# Altium PCB VOLTAGE_MEASURE.PcbDoc
Units mil, origin at the board's own origin, x right, y up, seen from the top; angles counter-clockwise.
Board outline 885.03 x 1027.53 mil, 2 copper layers (Top Layer, Bottom Layer); 24 components, 15 nets, 70 pads, 0 vias.
Unrouted connection lines stored in the file: 1.
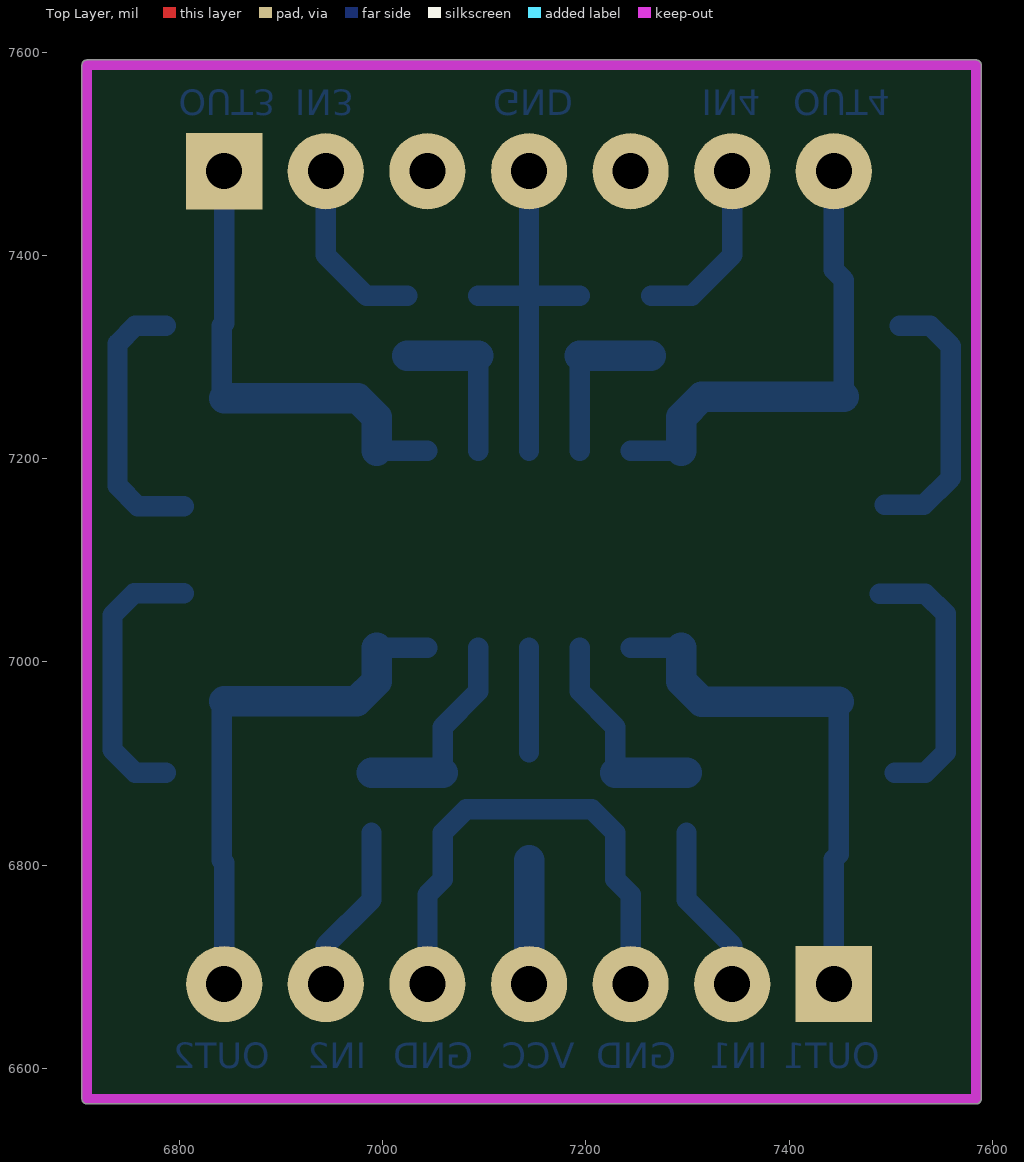
[diagram p0: Top Layer view]
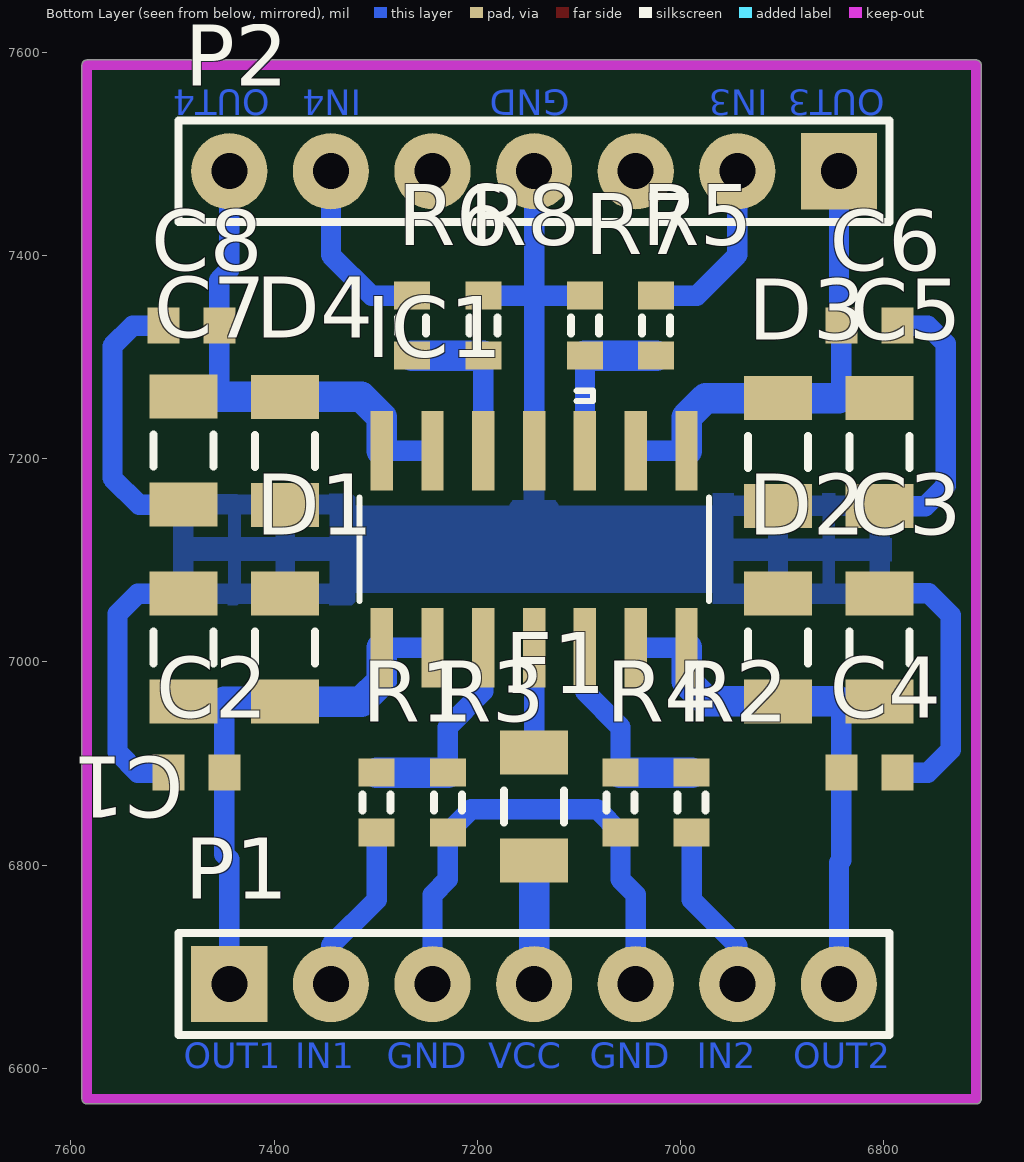
[diagram p1: Bottom Layer view, seen from below]

## Layer stack, top to bottom
Top Solder: solder mask 0.4, Solder Resist, Dk 3.5
Top Layer: signal copper 1.4
Dielectric 1: dielectric 12.6, FR-4, Dk 4.8
Bottom Layer: signal copper 1.4
Bottom Solder: solder mask 0.4, Solder Resist, Dk 3.5

## Board outline
6703.98,6570 ccw(c6709,6570) 6709,6564.98 7584,6564.98 ccw(c7584,6570) 7589.02,6570 7589.02,7587.5 ccw(c7584,7587.5) 7584,7592.52 6709,7592.52 ccw(c6709,7587.5) 6703.98,7587.5

## Design rules (kind name [scope] priority, off if disabled: settings)
Clearance [All] p1: gap=15 ignorepadtopadclearanceinfootprint=FALSE except(0: Arc-Text Arc-Hole Track-Text Track-Hole SMDPad-Text SMDPad-Hole THPad-Text THPad-Hole Via-Text Via-Hole Fill-Text Fill-Hole Poly-Text Poly-Hole Region-Text Region-Hole Text-Text Text-Hole; 10: Arc-Arc Arc-Track Arc-SMDPad Arc-THPad Arc-Via Track-Track Track-SMDPad Track-THPad Track-Via SMDPad-SMDPad SMDPad-THPad SMDPad-Via THPad-THPad THPad-Via Via-Via; 20: Arc-Fill Arc-Poly Arc-Region Track-Fill Track-Poly Track-Region)
PolygonConnect [All] p1: connectstyle=Relief reliefconductorwidth=20 reliefentries=4 polygonreliefangle="90 Angle" airgapwidth=10
RoomDefinition VOLTAGE_MEASURE [InComponentClass('VOLTAGE_MEASURE')] p1: confinementstyle=ConfineIn formatcopy=TRUE lockcomponents=FALSE outline 6709,6570 7584,6570 7584,7587.5 6709,7587.5
RoutingLayers [All] p1: top layer_v5=FALSE bottom layer_v5=TRUE
RoutingVias [All] p1: holewidth=28 width=50 viastyle="Through Hole" minholewidth=28 minwidth=50 maxholewidth=28 maxwidth=50
SolderMaskExpansion [All] p1: expansion=4
Width [All] p1: maxlimit=50 minlimit=10 preferedwidth=20 minimp=50.000000 maximp=50.000000 favimp=50.000000
29 further rules are at their usual default settings.

## Components (designator, comment, footprint, x,y, rotation, side; value= is the part's Value field where it differs from the comment)
C1 "Cap" C1206 7489,7014.15 r270 bottom value=10uF
C2 "Cap" 1608[0603] 7476.44,6891 r180 bottom value=0.1uF
C3 "Cap" C1206 6804,7014.35 r270 bottom value=10uF
C4 "Cap" 1608[0603] 6814,6891 r0 bottom value=0.1uF
C5 "Cap" C1206 6804,7206.55 r90 bottom value=10uF
C6 "Cap" 1608[0603] 6814,7331 r0 bottom value=0.1uF
C7 "Cap" C1206 7489,7208 r90 bottom value=10uF
C8 "Cap" 1608[0603] 7481.44,7331 r180 bottom value=0.1uF
D1 "D Zener" C1206 7389,7014.15 r270 bottom
D2 "D Zener" C1206 6904,7014.35 r270 bottom
D3 "D Zener" C1206 6904,7206.55 r90 bottom
D4 "D Zener" C1206 7389,7207.85 r90 bottom
F1 "Fuse 1" C1206 7144,6857.85 r270 bottom
IC1 "TLC274CDR" SOIC127P600X175-14N 7144,7111 r90 bottom
P1 "Header 7" HDR1X7 7444,6683 r180 bottom
P2 "Header 7" HDR1X7 6844,7483 r0 bottom
R1 "Res3" J1-0603 7299,6861.47 r270 bottom value=20K
R2 "Res3" J1-0603 6989,6861.47 r270 bottom value=20K
R3 "Res3" J1-0603 7229,6861.47 r90 bottom value=880
R4 "Res3" J1-0603 7059,6861.47 r90 bottom value=880
R5 "Res3" J1-0603 7024,7331 r90 bottom value=20K
R6 "Res3" J1-0603 7264,7331 r90 bottom value=20K
R7 "Res3" J1-0603 7094,7331 r270 bottom value=880
R8 "Res3" J1-0603 7194,7331 r270 bottom value=880

## Footprints (in the part's own frame and the unit in brackets; to place one, negate y for a bottom-side part, rotate by r counter-clockwise, add the part's x,y. Pads: shape width x height; smd on the part's side, far side on the other; paste and mask are expansions set on the pad)
1608[0603] [mm] "Chip Capacitor, Body 1.6x0.8mm, IPC High Density"
  rect 0.8x0.9 smd: 1(-0.7,0) 2(0.7,0)
  body extent -0.87,-0.48 0.87,0.48, height 1.3
C1206 [mm] "Chip Capacitor, Body 3.2x1.6mm, IPC High Density"
  rect 1.1x1.7 smd: 1(-1.35,0) 2(1.35,0)
  silkscreen extent -0.4,-0.75 0.4,0.75, body extent -1.7,-0.9 1.7,0.9, height 1.3
HDR1X7 [mm] "Connector; Header; 7 Position"
  rect 1.905x1.905 hole 0.9: 1(0,0)
  round 1.905 hole 0.9: 2(2.54,0) 3(5.08,0) 4(7.62,0) 5(10.16,0) 6(12.7,0) 7(15.24,0)
  silkscreen extent -1.27,-1.27 16.51,1.27
J1-0603 [mm] "Chip Resistor, Body 1.6x0.8mm, IPC High Density"
  rect 0.7x0.9 smd: 1(-0.75,0) 2(0.75,0)
  silkscreen extent -0.2,-0.35 0.2,0.35, body extent -0.85,-0.48 0.85,0.48, height 0.9
SOIC127P600X175-14N [mil]
  rect 78x22 smd: 1(-97,150) 2(-97,100) 3(-97,50) 4(-97,0) 5(-97,-50) 6(-97,-100) 7(-97,-150) 8(97,-150) 9(97,-100) 10(97,-50) 11(97,0) 12(97,50) 13(97,100) 14(97,150)
  silkscreen extent -51,-172 156,172

## Part data
C1 C2 C3 C4 C5 C6 C7 C8: "Capacitor", LatestRevisionDate=17-Jul-2002, LatestRevisionNote="Re-released for DXP Platform.", PackageDescription="Radial Cap, Thru-Hole; 2 Leads; 0.3 in Pin Spacing", PackageReference=RAD-0.3, Published=8-Jun-2000, Publisher="Altium Limited"
D1 D2 D3 D4: "Zener Diode", LatestRevisionDate=17-Jul-2002, LatestRevisionNote="Re-released for DXP Platform.", PackageDescription="Diode, Thru-Hole; 2 Leads; 0.7 in Pin Spacing", PackageReference=DIODE-0.7, Published=8-Jun-2000, Publisher="Altium Limited"
F1: "Fuse", LatestRevisionDate=17-Jul-2002, LatestRevisionNote="Re-released for DXP Platform.", PackageDescription="Thru-Hole; 2 Leads", PackageReference=PIN-W2/E2.8, Published=8-Jun-2000, Publisher="Altium Limited"
IC1: "Integrated Circuit", Manufacturer_Name="Texas Instruments", Mouser Part Number=595-TLC274CDR, RS Part Number=0527237, Datasheet Link=http://www.ti.com/lit/gpn/tlc274, Manufacturer_Part_Number=TLC274CDR, Mouser Price/Stock=https://www.mouser.com/Search/Refine.aspx?Keyword=595-TLC274CDR, RS Price/Stock=http://uk.rs-online.com/web/p/products/0527237
P1 P2: "Header, 7-Pin", LatestRevisionDate=17-Jul-2002, LatestRevisionNote="Re-released for DXP Platform.", Publisher="Altium Limited"
R1 R2 R3 R4 R5 R6 R7 R8: "Resistor", LatestRevisionDate=29-May-2009, LatestRevisionNote="IPC-7351 Footprint Added.", PackageDescription="Chip Resistor", PackageReference=J1-0603, Published=8-Jun-2000, Publisher="Altium Limited"

## Nets (pads, with @x,y where several pads share a name; then routed paths per layer and width w, separated by ;. In a path a pad name is that pad's centre, name@x,y a point inside that pad or via, vN(x,y) a via of type N, cw(c..) or ccw(c..) an arc to the next point about the centre after c; other vN are vias at no path point)
+5: F1.2 P1.4 | length 121.7
  Bottom Layer w30: P1.4 F1.2
+5_Fused: F1.1 IC1.4 | length 103
  Bottom Layer w20: F1.1 IC1.4
GND: C1.1 C2.1 C3.1 C4.1 C5.1 C6.1 C7.1 C8.1 D1.1 D2.1 D3.1 D4.1 IC1.11 P1.3 P1.5 P2.4 R3.1 R4.1 R7.1 R8.1 | length 1920.7
  Bottom Layer w20: C4.1 6756.56,6891 6734,6913.56 6734,7046 6755.5,7067.5 C3.1 ; C6.1 6756.56,7331 6739,7313.44 6739,7173.4 6759,7153.4 C5.1 ; P1.5 7044,6771 7059,6786 R4.1 7082.06,6855 7205.94,6855 R3.1 7229,6786 7244,6771 P1.3 ; R7.1 7144,7360.53 ; IC1.11 7144,7360.53 ; P2.4@7144,7456 7144,7360.53 ; R8.1 7144,7360.53 ; C1.1 7534.2,7067.3 7554,7047.5 7554,6911 7534,6891 C2.1 ; C7.1@7494,7154.7 7532.7,7154.7 7559,7181 7559,7311 7539,7331 C8.1
IN1: P1.2 R1.2 | length 167.6
  Bottom Layer w20: R1.2 7299,6766 7344,6721 P1.2
IN2: P1.6 R2.2 | length 167.6
  Bottom Layer w20: P1.6 6944,6721 6989,6766 R2.2
IN3: P2.2 R5.2 | length 152
  Bottom Layer w20: P2.2@6944,7456 6944,7400.53 6984,7360.53 R5.2
IN4: P2.6 R6.2 | length 152
  Bottom Layer w20: R6.2 7304,7360.53 7344,7400.53 P2.6@7344,7456
OP_IN1: IC1.3 R1.1 R3.2 | length 207.5
  Bottom Layer w20: IC1.3 7194,6971 7229,6936 R3.2
  Bottom Layer w30: R3.2 R1.1
OP_IN2: IC1.5 R2.1 R4.2 | length 207.5
  Bottom Layer w20: R4.2 7059,6936 7094,6971 IC1.5
  Bottom Layer w30: R2.1 R4.2
OP_IN3: IC1.10 R5.1 R7.2 | length 163.5
  Bottom Layer w20: IC1.10 R7.2
  Bottom Layer w30: R5.1 R7.2
OP_IN4: IC1.12 R6.1 R8.2 | length 163.5
  Bottom Layer w20: IC1.12 R8.2
  Bottom Layer w30: R8.2 R6.1
OUT1: C1.2 C2.2 D1.2 IC1.1 IC1.2 P1.1 | length 526.4
  Bottom Layer w20: IC1.2 IC1.1 ; P1.1 7444,6806 7448.88,6810.88 C2.2 7448.88,6960.88 7449,6961
  Bottom Layer w30: IC1.1 7294,6981 7314,6961 D1.2 7449,6961
OUT2: C3.2 C4.2 D2.2 IC1.6 IC1.7 P1.7 | length 521.4
  Bottom Layer w20: P1.7 6844,6802.26 6841.56,6804.7 C4.2 6841.56,6958.76 6844,6961.2 ; IC1.7 IC1.6
  Bottom Layer w30: 6844,6961.2 D2.2 6974.2,6961.2 6994,6981 IC1.7
OUT3: C5.2 C6.2 D3.2 IC1.8 IC1.9 P2.1 | length 439.1
  Bottom Layer w20: 6844,7259.7 6841.56,7262.14 C6.2 6844,7333.44 P2.1@6844,7456 ; IC1.8 IC1.9
  Bottom Layer w30: 6844,7259.7 D3.2 6975.3,7259.7 6994,7241 IC1.8
OUT4: C7.2 C8.2 D4.2 IC1.13 IC1.14 P2.7 | length 450.4
  Bottom Layer w20: IC1.13 IC1.14 ; P2.7@7444,7456 7444,7385.88 7453.88,7376 C8.2 7453.88,7261.12 7454,7261
  Bottom Layer w30: IC1.14 7294,7241 7314,7261 D4.2 7454,7261
pads on no net: P2.3 P2.5

## Polygon pours and split planes (outlines as drawn)
GND on Bottom Layer "Bottom Layer-GND" (solid, pour order 2): 7499,7056.1 7319,7055.9 7319,7038.24 7319,7036 6969,7036 6969,7038.24 6968.8,7057.5 6792,7057.5 6792,7166 7109,7166 7109,7191 7179,7191 7179,7166 7499,7164.85

## Keep-outs
Keep-Out Layer:
  lines w10: 6709,6570 6709,7587.5 7584,7587.5 7584,6570 6709,6570

## Other copper
Bottom Layer:
  text "OUT3" at 6799,7563 h25 r180
  text "IN3" at 6914,7563 h25 r180
  text "GND" at 7109,7563 h25 r180
  text "IN4" at 7314,7563 h25 r180
  text "OUT4" at 7404,7563 h25 r180
  text "OUT2" at 6889,6600 h25
  text "IN2" at 6984,6600 h25
  text "GND" at 7089,6600 h25
  text "VCC" at 7189,6600 h25
  text "GND" at 7289,6600 h25
  text "IN1" at 7379,6600 h25
  text "OUT1" at 7489,6600 h25